# Altium PCB HGD_Sensor(v0.1)-20200807.PcbDoc (part 2 of 3)
Units mil, origin at the board's own origin, x right, y up, seen from the top; angles counter-clockwise.
Board outline 2299.21 x 2125.98 mil, 2 copper layers (TopLayer, BottomLayer); 55 components, 33 nets, 176 pads, 331 vias.
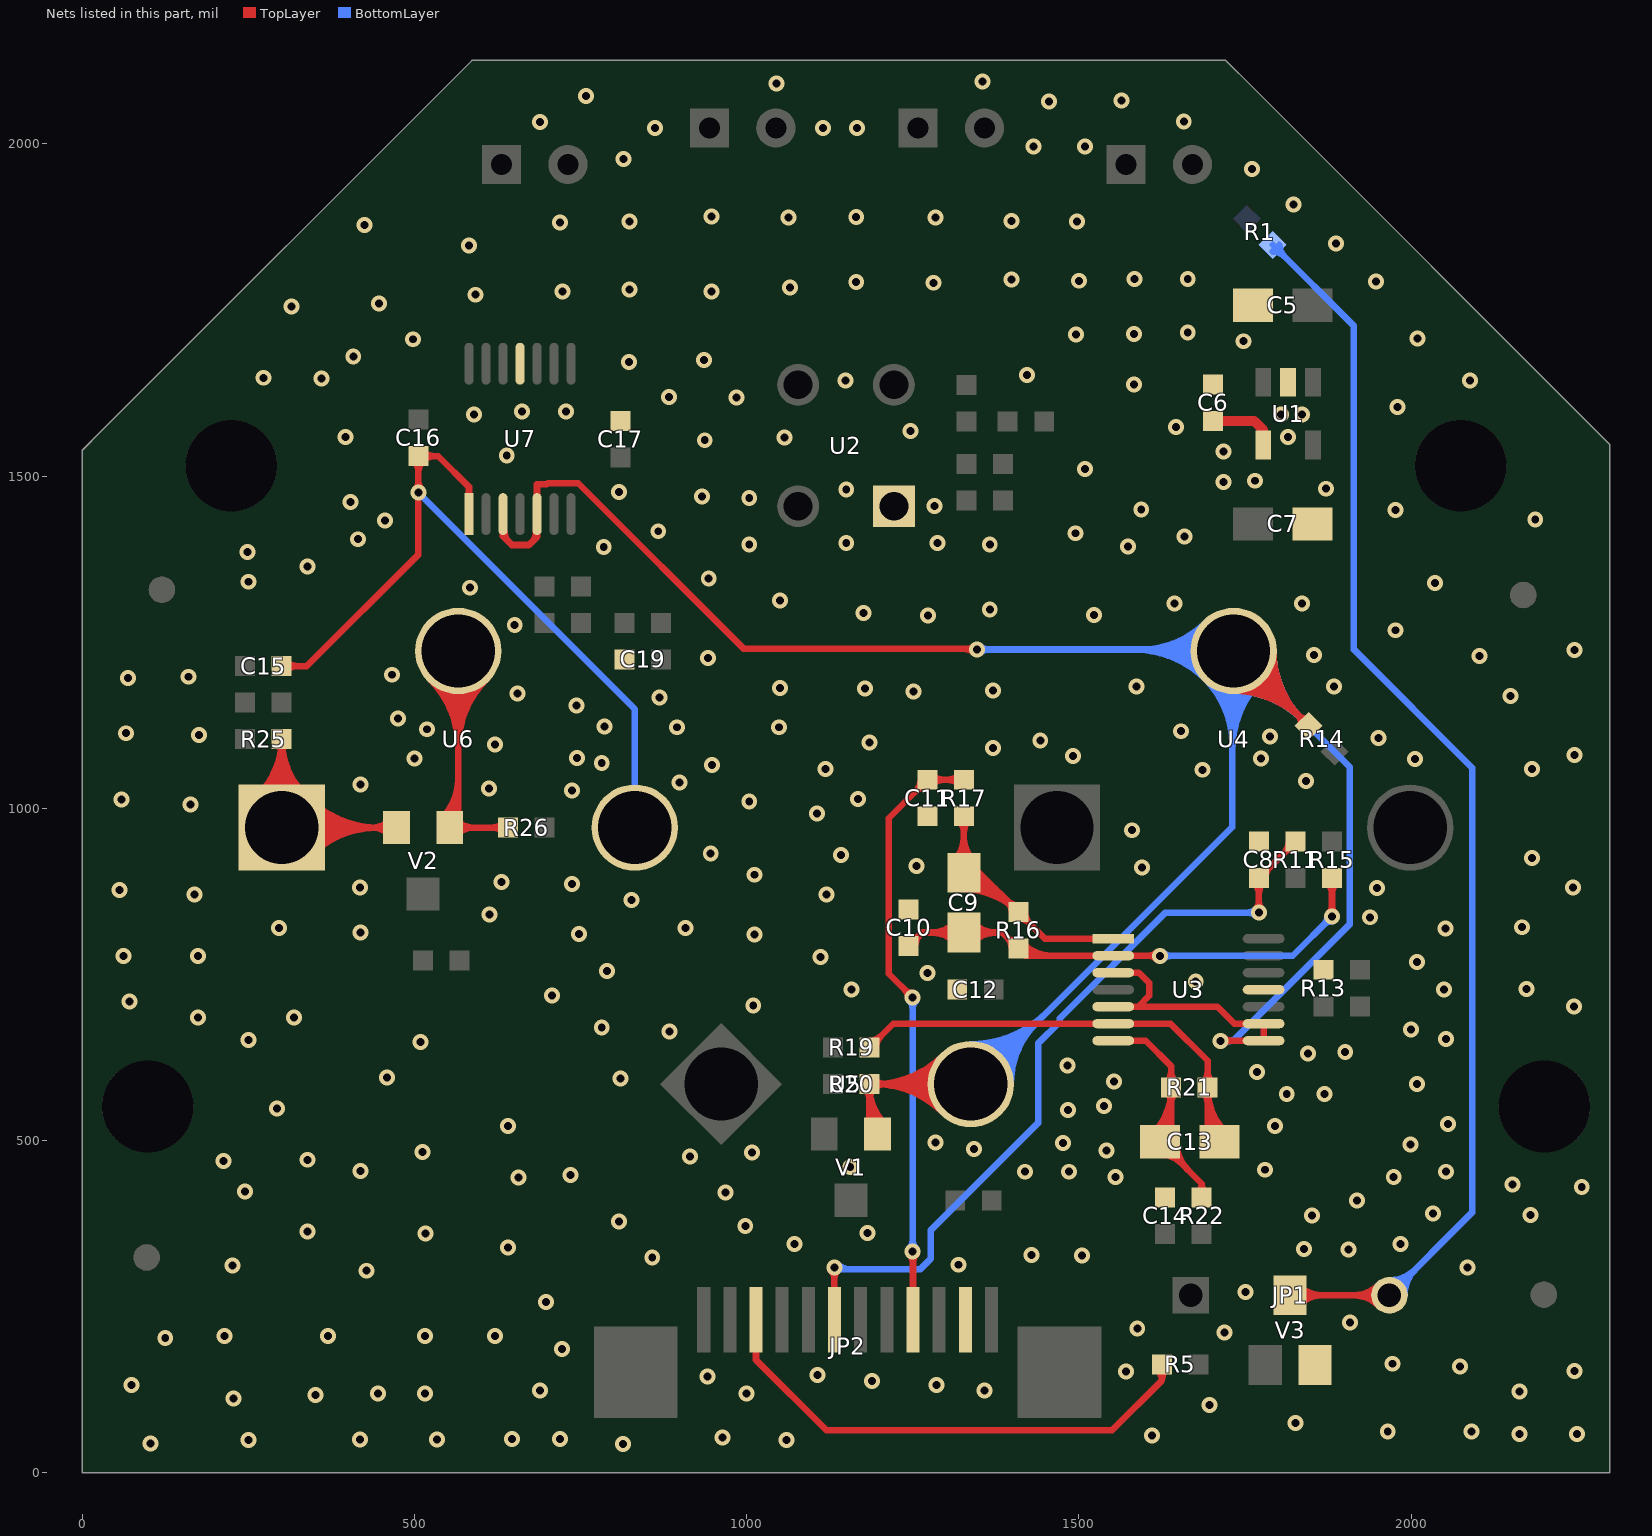
[diagram p2: the nets of this part, all layers, seen from the top]

## Via types
v1: diameter 24, hole 12, TopLayer to BottomLayer, tented both sides, 331 vias

## Nets (pads, with @x,y where several pads share a name; then routed paths per layer and width w, separated by ;. In a path a pad name is that pad's centre, name@x,y a point inside that pad or via, vN(x,y) a via of type N, cw(c..) or ccw(c..) an arc to the next point about the centre after c; other vN are vias at no path point) (continued)
ADC_LEL: C8.1 JP2.7 R11.1 | length 1983.7
  TopLayer w10: v1(1132,309) 1132,230.32 JP2.7@1132.32,230 ; v1(1771,843) C8.1@1771,895 R11.1@1826,950 ; v1@1127.05,304.05 cw(c1115.1,292.1) 1132,292.1 ; v1@1127.05,304.05 cw(c1115.1,292.1) 1132,292.1 ; v1@1127.05,304.05 cw(c1115.1,292.1) 1132,292.1 ; v1@1127.05,304.05 cw(c1115.1,292.1) 1132,292.1 ; JP2.7@1128.89,272.79 ccw(c1121.38,280.3) 1132,280.3 ; JP2.7@1128.89,272.79 ccw(c1121.38,280.3) 1132,280.3 ; JP2.7@1128.89,272.79 ccw(c1121.38,280.3) 1132,280.3 ; JP2.7@1128.89,272.79 ccw(c1121.38,280.3) 1132,280.3 ; 1132,281.82 ccw(c1144.77,281.82) JP2.7@1135.74,272.79 ; 1132,281.82 ccw(c1144.77,281.82) JP2.7@1135.74,272.79 ; 1132,281.82 ccw(c1144.77,281.82) JP2.7@1135.74,272.79 ; 1132,281.82 ccw(c1144.77,281.82) JP2.7@1135.74,272.79 ; 1132,292.1 cw(c1148.9,292.1) v1@1136.95,304.05 ; 1132,292.1 cw(c1148.9,292.1) v1@1136.95,304.05 ; 1132,292.1 cw(c1148.9,292.1) v1@1136.95,304.05 ; 1132,292.1 cw(c1148.9,292.1) v1@1136.95,304.05 ; C8.1@1763.93,887.93 cw(c1746.86,870.86) 1771,870.86 ; C8.1@1763.93,887.93 cw(c1746.86,870.86) 1771,870.86 ; C8.1@1763.93,887.93 cw(c1746.86,870.86) 1771,870.86 ; C8.1@1763.93,887.93 cw(c1746.86,870.86) 1771,870.86 ; v1@1766.05,847.95 ccw(c1754.1,859.9) 1771,859.9 ; v1@1766.05,847.95 ccw(c1754.1,859.9) 1771,859.9 ; v1@1766.05,847.95 ccw(c1754.1,859.9) 1771,859.9 ; v1@1766.05,847.95 ccw(c1754.1,859.9) 1771,859.9 ; 1771,859.9 ccw(c1787.9,859.9) v1@1775.95,847.95 ; 1771,859.9 ccw(c1787.9,859.9) v1@1775.95,847.95 ; 1771,859.9 ccw(c1787.9,859.9) v1@1775.95,847.95 ; 1771,859.9 ccw(c1787.9,859.9) v1@1775.95,847.95 ; 1771,870.86 cw(c1795.14,870.86) C8.1@1778.07,887.93 ; 1771,870.86 cw(c1795.14,870.86) C8.1@1778.07,887.93 ; 1771,870.86 cw(c1795.14,870.86) C8.1@1778.07,887.93 ; 1771,870.86 cw(c1795.14,870.86) C8.1@1778.07,887.93 ; C8.1@1771,905 ccw(c1771,929.14) 1788.07,912.07 ; C8.1@1771,905 ccw(c1771,929.14) 1788.07,912.07 ; C8.1@1771,905 ccw(c1771,929.14) 1788.07,912.07 ; C8.1@1771,905 ccw(c1771,929.14) 1788.07,912.07 ; C8.1@1781,895 cw(c1805.14,895) 1788.07,912.07 ; C8.1@1781,895 cw(c1805.14,895) 1788.07,912.07 ; C8.1@1781,895 cw(c1805.14,895) 1788.07,912.07 ; C8.1@1781,895 cw(c1805.14,895) 1788.07,912.07 ; 1808.93,932.93 ccw(c1791.86,950) 1816,950 cw(c1791.86,950) 1808.93,932.93 ; 1808.93,932.93 cw(c1826,915.86) 1826,940 ccw(c1826,915.86) 1808.93,932.93
  BottomLayer w10: v1(1132,309) 1135,306 1261.18,306 1277,321.82 1277,364.47 1438.73,526.2 1438.73,645.92 1471.26,678.45 1471.26,683.79 1630.47,843 v1(1771,843) ; 1754.1,843 ccw(c1754.1,859.9) v1@1766.05,847.95 ; 1754.1,843 cw(c1754.1,826.1) v1@1766.05,838.05 ; 1754.1,843 ccw(c1754.1,859.9) v1@1766.05,847.95 ; 1754.1,843 cw(c1754.1,826.1) v1@1766.05,838.05 ; 1754.1,843 ccw(c1754.1,859.9) v1@1766.05,847.95 ; 1754.1,843 cw(c1754.1,826.1) v1@1766.05,838.05 ; 1754.1,843 ccw(c1754.1,859.9) v1@1766.05,847.95 ; 1754.1,843 cw(c1754.1,826.1) v1@1766.05,838.05 ; v1@1136.95,313.95 ccw(c1156.14,333.14) 1156.14,306 cw(c1156.14,333.14) v1@1136.95,313.95
ADC_O2: C11.1 JP2.4 R17.1 | length 1784.5
  TopLayer w10: v1(1250,333) 1250.43,332.57 JP2.4@1250.43,230 ; v1(1250,715) 1214,751 1214,985 C11.1@1272,1043 R17.1@1327,1043 ; 1238.05,726.95 ccw(c1250,738.9) v1@1250,722 ; 1238.05,726.95 cw(c1226.1,715) v1@1243,715 ; 1238.05,726.95 ccw(c1250,738.9) v1@1250,722 ; 1238.05,726.95 cw(c1226.1,715) v1@1243,715 ; 1238.05,726.95 ccw(c1250,738.9) v1@1250,722 ; 1238.05,726.95 cw(c1226.1,715) v1@1243,715 ; 1238.05,726.95 ccw(c1250,738.9) v1@1250,722 ; 1238.05,726.95 cw(c1226.1,715) v1@1243,715 ; v1@1245.05,328.05 cw(c1232.07,315.07) 1250.43,315.07 ; v1@1245.05,328.05 cw(c1232.07,315.07) 1250.43,315.07 ; v1@1245.05,328.05 cw(c1232.07,315.07) 1250.43,315.07 ; v1@1245.05,328.05 cw(c1232.07,315.07) 1250.43,315.07 ; JP2.4@1247,272.79 ccw(c1238.73,281.06) 1250.43,281.06 ; JP2.4@1247,272.79 ccw(c1238.73,281.06) 1250.43,281.06 ; JP2.4@1247,272.79 ccw(c1238.73,281.06) 1250.43,281.06 ; JP2.4@1247,272.79 ccw(c1238.73,281.06) 1250.43,281.06 ; 1250.43,281.06 ccw(c1262.12,281.06) JP2.4@1253.85,272.79 ; 1250.43,281.06 ccw(c1262.12,281.06) JP2.4@1253.85,272.79 ; 1250.43,281.06 ccw(c1262.12,281.06) JP2.4@1253.85,272.79 ; 1250.43,281.06 ccw(c1262.12,281.06) JP2.4@1253.85,272.79 ; 1250.43,317.13 cw(c1265.87,317.13) v1@1254.95,328.05 ; 1250.43,317.13 cw(c1265.87,317.13) v1@1254.95,328.05 ; 1250.43,317.13 cw(c1265.87,317.13) v1@1254.95,328.05 ; 1250.43,317.13 cw(c1265.87,317.13) v1@1254.95,328.05 ; 1254.93,1025.93 ccw(c1237.86,1043) 1262,1043 cw(c1237.86,1043) 1254.93,1025.93 ; 1254.93,1025.93 cw(c1272,1008.86) 1272,1033 ccw(c1272,1008.86) 1254.93,1025.93 ; C11.1@1279.07,1035.93 cw(c1296.14,1018.86) 1296.14,1043 ; C11.1@1279.07,1035.93 cw(c1296.14,1018.86) 1296.14,1043 ; C11.1@1279.07,1035.93 cw(c1296.14,1018.86) 1296.14,1043 ; C11.1@1279.07,1035.93 cw(c1296.14,1018.86) 1296.14,1043 ; C11.1@1279.07,1050.07 ccw(c1296.14,1067.14) 1296.14,1043 ; C11.1@1279.07,1050.07 ccw(c1296.14,1067.14) 1296.14,1043 ; C11.1@1279.07,1050.07 ccw(c1296.14,1067.14) 1296.14,1043 ; C11.1@1279.07,1050.07 ccw(c1296.14,1067.14) 1296.14,1043 ; 1302.86,1043 ccw(c1302.86,1067.14) R17.1@1319.93,1050.07 ; 1302.86,1043 cw(c1302.86,1018.86) R17.1@1319.93,1035.93 ; 1302.86,1043 ccw(c1302.86,1067.14) R17.1@1319.93,1050.07 ; 1302.86,1043 cw(c1302.86,1018.86) R17.1@1319.93,1035.93 ; 1302.86,1043 ccw(c1302.86,1067.14) R17.1@1319.93,1050.07 ; 1302.86,1043 cw(c1302.86,1018.86) R17.1@1319.93,1035.93 ; 1302.86,1043 ccw(c1302.86,1067.14) R17.1@1319.93,1050.07 ; 1302.86,1043 cw(c1302.86,1018.86) R17.1@1319.93,1035.93
  BottomLayer w10: v1(1250,333) v1(1250,715) ; v1@1245.05,337.95 ccw(c1233.1,349.9) 1250,349.9 ; v1@1245.05,337.95 ccw(c1233.1,349.9) 1250,349.9 ; v1@1245.05,337.95 ccw(c1233.1,349.9) 1250,349.9 ; v1@1245.05,337.95 ccw(c1233.1,349.9) 1250,349.9 ; v1@1245.05,710.05 cw(c1233.1,698.1) 1250,698.1 ; v1@1245.05,710.05 cw(c1233.1,698.1) 1250,698.1 ; v1@1245.05,710.05 cw(c1233.1,698.1) 1250,698.1 ; v1@1245.05,710.05 cw(c1233.1,698.1) 1250,698.1 ; 1250,349.9 ccw(c1266.9,349.9) v1@1254.95,337.95 ; 1250,349.9 ccw(c1266.9,349.9) v1@1254.95,337.95 ; 1250,349.9 ccw(c1266.9,349.9) v1@1254.95,337.95 ; 1250,349.9 ccw(c1266.9,349.9) v1@1254.95,337.95 ; 1250,698.1 cw(c1266.9,698.1) v1@1254.95,710.05 ; 1250,698.1 cw(c1266.9,698.1) v1@1254.95,710.05 ; 1250,698.1 cw(c1266.9,698.1) v1@1254.95,710.05 ; 1250,698.1 cw(c1266.9,698.1) v1@1254.95,710.05
AGND: R14.1 R20.2 U3.3 U3.5 U3.8 U3.9 U4.2 U5.2 U7.3 U7.5 V1.1 | length 15126
  TopLayer w10: U7.3@633.41,1442.81 633.41,1409.59 646.68,1396.32 672.32,1396.32 684.59,1408.59 U7.5@684.59,1442.81 684.59,1487.59 699.4,1487.59 ; 701.11,1489.31 746.69,1489.31 996,1240 v1@1346,1240 ; V1.1@1197,510 1185,522 R20.2@1185,585 1337.43,585 U5.2@1337.52,584.91 ; U3.5@1551.81,701.41 1589.41,701.41 ; U3.3@1551.81,752.59 1590.41,752.59 1606,737 1606,718 1589.41,701.41 ; v1@1713.23,650.23 U3.8@1778.19,650.23 U3.9@1778.19,675.82 1734.18,675.82 1708.59,701.41 1589.41,701.41 ; U4.2@1733,1236.75 1733.25,1236.75 R14.1@1846,1124 ; U7.3@635.3,1418.17 ccw(c659.48,1417.72) 642.38,1400.62 ; U7.3@635.3,1418.17 ccw(c659.48,1417.72) 642.38,1400.62 ; U7.3@635.3,1418.17 ccw(c659.48,1417.72) 642.38,1400.62 ; U7.3@635.3,1418.17 ccw(c659.48,1417.72) 642.38,1400.62 ; 677.12,1401.12 ccw(c663.12,1415.12) U7.5@682.72,1417.94 ; 677.12,1401.12 ccw(c663.12,1415.12) U7.5@682.72,1417.94 ; 677.12,1401.12 ccw(c663.12,1415.12) U7.5@682.72,1417.94 ; 677.12,1401.12 ccw(c663.12,1415.12) U7.5@682.72,1417.94 ; R20.2@1177.93,577.93 cw(c1160.86,560.86) 1185,560.86 ; R20.2@1177.93,577.93 cw(c1160.86,560.86) 1185,560.86 ; R20.2@1177.93,577.93 cw(c1160.86,560.86) 1185,560.86 ; R20.2@1177.93,577.93 cw(c1160.86,560.86) 1185,560.86 ; 1185,560.86 cw(c1209.14,560.86) R20.2@1192.07,577.93 ; 1185,560.86 cw(c1209.14,560.86) R20.2@1192.07,577.93 ; 1185,560.86 cw(c1209.14,560.86) R20.2@1192.07,577.93 ; 1185,560.86 cw(c1209.14,560.86) R20.2@1192.07,577.93 ; R20.2@1192.07,577.93 cw(c1209.14,560.86) 1209.14,585 ; R20.2@1192.07,577.93 cw(c1209.14,560.86) 1209.14,585 ; R20.2@1192.07,577.93 cw(c1209.14,560.86) 1209.14,585 ; R20.2@1192.07,577.93 cw(c1209.14,560.86) 1209.14,585 ; R20.2@1192.07,592.07 ccw(c1209.14,609.14) 1209.14,585 ; R20.2@1192.07,592.07 ccw(c1209.14,609.14) 1209.14,585 ; R20.2@1192.07,592.07 ccw(c1209.14,609.14) 1209.14,585 ; R20.2@1192.07,592.07 ccw(c1209.14,609.14) 1209.14,585 ; v1@1717.95,645.05 cw(c1730.45,632.55) 1730.45,650.23 ; v1@1717.95,645.05 cw(c1730.45,632.55) 1730.45,650.23 ; v1@1717.95,645.05 cw(c1730.45,632.55) 1730.45,650.23 ; v1@1717.95,645.05 cw(c1730.45,632.55) 1730.45,650.23 ; v1@1717.95,654.95 ccw(c1729.35,666.35) 1729.35,650.23 ; v1@1717.95,654.95 ccw(c1729.35,666.35) 1729.35,650.23 ; v1@1717.95,654.95 ccw(c1729.35,666.35) 1729.35,650.23 ; v1@1717.95,654.95 ccw(c1729.35,666.35) 1729.35,650.23 ; U4.2@1733,1176.79 cw(c1733,1031.42) R14.1@1835.79,1134.21 ; U4.2@1733,1176.79 cw(c1733,1031.42) R14.1@1835.79,1134.21 ; U4.2@1733,1176.79 cw(c1733,1031.42) R14.1@1835.79,1134.21 ; U4.2@1733,1176.79 cw(c1733,1031.42) R14.1@1835.79,1134.21 ; U4.2@1733,1176.79 cw(c1733,1031.42) R14.1@1835.79,1134.21 ; U4.2@1733,1186.79 cw(c1733,1065.56) 1818.72,1151.28 ; U4.2@1733,1186.79 cw(c1733,1065.56) 1818.72,1151.28 ; U4.2@1733,1186.79 cw(c1733,1065.56) 1818.72,1151.28 ; U4.2@1733,1186.79 cw(c1733,1065.56) 1818.72,1151.28 ; U4.2@1733,1186.79 cw(c1733,1065.56) 1818.72,1151.28 ; U4.2@1733,1196.79 cw(c1733,1099.71) 1801.65,1168.35 ; U4.2@1733,1196.79 cw(c1733,1099.71) 1801.65,1168.35 ; U4.2@1733,1196.79 cw(c1733,1099.71) 1801.65,1168.35 ; U4.2@1733,1196.79 cw(c1733,1099.71) 1801.65,1168.35 ; U4.2@1733,1196.79 cw(c1733,1099.71) 1801.65,1168.35 ; U4.2@1733,1206.79 cw(c1733,1133.85) 1784.58,1185.42 ; U4.2@1733,1206.79 cw(c1733,1133.85) 1784.58,1185.42 ; U4.2@1733,1206.79 cw(c1733,1133.85) 1784.58,1185.42 ; U4.2@1733,1206.79 cw(c1733,1133.85) 1784.58,1185.42 ; U4.2@1733,1206.79 cw(c1733,1133.85) 1784.58,1185.42 ; U4.2@1762.96,1236.75 ccw(c1834.68,1236.75) 1783.97,1186.03 ; U4.2@1762.96,1236.75 ccw(c1834.68,1236.75) 1783.97,1186.03 ; U4.2@1762.96,1236.75 ccw(c1834.68,1236.75) 1783.97,1186.03 ; U4.2@1762.96,1236.75 ccw(c1834.68,1236.75) 1783.97,1186.03 ; U4.2@1762.96,1236.75 ccw(c1834.68,1236.75) 1783.97,1186.03 ; U4.2@1772.96,1236.75 ccw(c1868.83,1236.75) 1801.04,1168.96 ; U4.2@1772.96,1236.75 ccw(c1868.83,1236.75) 1801.04,1168.96 ; U4.2@1772.96,1236.75 ccw(c1868.83,1236.75) 1801.04,1168.96 ; U4.2@1772.96,1236.75 ccw(c1868.83,1236.75) 1801.04,1168.96 ; U4.2@1772.96,1236.75 ccw(c1868.83,1236.75) 1801.04,1168.96 ; U4.2@1782.96,1236.75 ccw(c1902.97,1236.75) 1818.11,1151.89 ; U4.2@1782.96,1236.75 ccw(c1902.97,1236.75) 1818.11,1151.89 ; U4.2@1782.96,1236.75 ccw(c1902.97,1236.75) 1818.11,1151.89 ; U4.2@1782.96,1236.75 ccw(c1902.97,1236.75) 1818.11,1151.89 ; U4.2@1782.96,1236.75 ccw(c1902.97,1236.75) 1818.11,1151.89 ; U4.2@1792.96,1236.75 ccw(c1937.11,1236.75) 1835.18,1134.82 ; U4.2@1792.96,1236.75 ccw(c1937.11,1236.75) 1835.18,1134.82 ; U4.2@1792.96,1236.75 ccw(c1937.11,1236.75) 1835.18,1134.82 ; U4.2@1792.96,1236.75 ccw(c1937.11,1236.75) 1835.18,1134.82 ; U4.2@1792.96,1236.75 ccw(c1937.11,1236.75) 1835.18,1134.82 ; 1828.93,1141.07 cw(c1811.86,1124) R14.1@1836,1124 ; 1828.93,1141.07 ccw(c1846,1158.14) R14.1@1846,1134 ; 1828.93,1141.07 ccw(c1846,1158.14) R14.1@1846,1134 ; 1828.93,1141.07 cw(c1811.86,1124) R14.1@1836,1124 ; 1828.93,1141.07 ccw(c1846,1158.14) R14.1@1846,1134 ; 1828.93,1141.07 cw(c1811.86,1124) R14.1@1836,1124 ; 1828.93,1141.07 ccw(c1846,1158.14) R14.1@1846,1134 ; 1828.93,1141.07 cw(c1811.86,1124) R14.1@1836,1124 ; 1828.93,1141.07 ccw(c1846,1158.14) R14.1@1846,1134 ; 1828.93,1141.07 cw(c1811.86,1124) R14.1@1836,1124 ; V1.1@1185,531.9 ccw(c1213.9,531.9) 1193.46,511.46 cw(c1213.9,531.9) V1.1@1185,531.9 ; 1185,556.04 ccw(c1238.04,556.04) 1200.54,518.54 cw(c1238.04,556.04) 1185,556.04 ; R20.2@1185,580.18 ccw(c1262.18,580.18) 1207.61,525.61 cw(c1262.18,580.18) R20.2@1185,580.18 ; R20.2@1192.55,585 cw(c1192.55,439.94) 1295.12,542.51 ccw(c1192.55,439.94) R20.2@1192.55,585 ; R20.2@1192.97,585 ccw(c1192.97,729.46) 1295.12,627.31 cw(c1192.97,729.46) R20.2@1192.97,585 ; 1216.69,585 cw(c1216.69,464.08) 1302.19,549.58 ccw(c1216.69,464.08) 1216.69,585 ; 1217.11,585 ccw(c1217.11,705.32) 1302.19,620.24 cw(c1217.11,705.32) 1217.11,585 ; 1240.83,585 cw(c1240.83,488.23) 1309.26,556.66 ccw(c1240.83,488.23) 1240.83,585 ; 1241.26,585 ccw(c1241.26,681.17) 1309.26,613.17 cw(c1241.26,681.17) 1241.26,585 ; 1264.98,585 cw(c1264.98,512.37) 1316.33,563.73 ccw(c1264.98,512.37) 1264.98,585 ; 1265.4,585 ccw(c1265.4,657.03) 1316.33,606.1 cw(c1265.4,657.03) 1265.4,585 ; 1327.69,1240 cw(c1327.69,1219.69) 1342.05,1234.05 ccw(c1327.69,1219.69) 1327.69,1240 ; 1332.51,1240 ccw(c1332.51,1253.49) 1342.05,1243.95 cw(c1332.51,1253.49) 1332.51,1240
  BottomLayer w10: U5.2@1337.52,584.91 1344.1,584.91 1730.75,971.56 U4.2@1730.75,1239 ; v1(1347,1239) U4.2@1730.75,1239 ; v1(1713,650) 1732.18,650 1908,825.82 1908,1061.75 U4.2@1733,1236.75 U4.2@1730.75,1239 ; v1@1351.95,1234.05 cw(c1363.9,1222.1) 1363.9,1239 ; v1@1351.95,1234.05 cw(c1363.9,1222.1) 1363.9,1239 ; v1@1351.95,1234.05 cw(c1363.9,1222.1) 1363.9,1239 ; v1@1351.95,1234.05 cw(c1363.9,1222.1) 1363.9,1239 ; v1@1351.95,1243.95 ccw(c1363.9,1255.9) 1363.9,1239 ; v1@1351.95,1243.95 ccw(c1363.9,1255.9) 1363.9,1239 ; v1@1351.95,1243.95 ccw(c1363.9,1255.9) 1363.9,1239 ; v1@1351.95,1243.95 ccw(c1363.9,1255.9) 1363.9,1239 ; U4.2@1690.6,1194.35 cw(c1593.68,1097.43) 1730.75,1097.43 ccw(c1593.68,1097.43) U4.2@1690.6,1194.35 ; U4.2@1690.6,1194.35 ccw(c1582.81,1086.55) 1582.81,1239 cw(c1582.81,1086.55) U4.2@1690.6,1194.35 ; U4.2@1697.67,1201.42 cw(c1617.82,1121.57) 1730.75,1121.57 ccw(c1617.82,1121.57) U4.2@1697.67,1201.42 ; U4.2@1697.67,1201.42 ccw(c1606.95,1110.7) 1606.95,1239 cw(c1606.95,1110.7) U4.2@1697.67,1201.42 ; U4.2@1704.74,1208.49 cw(c1641.96,1145.71) 1730.75,1145.71 ccw(c1641.96,1145.71) U4.2@1704.74,1208.49 ; U4.2@1704.74,1208.49 ccw(c1631.09,1134.84) 1631.09,1239 cw(c1631.09,1134.84) U4.2@1704.74,1208.49 ; U4.2@1711.81,1215.56 cw(c1666.11,1169.85) 1730.75,1169.85 ccw(c1666.11,1169.85) U4.2@1711.81,1215.56 ; U4.2@1711.81,1215.56 ccw(c1655.23,1158.98) 1655.23,1239 cw(c1655.23,1158.98) U4.2@1711.81,1215.56 ; v1@1717.95,645.05 cw(c1729.9,633.1) 1729.9,650 ; v1@1717.95,645.05 cw(c1729.9,633.1) 1729.9,650 ; v1@1717.95,645.05 cw(c1729.9,633.1) 1729.9,650 ; v1@1717.95,645.05 cw(c1729.9,633.1) 1729.9,650 ; v1@1717.95,654.95 ccw(c1729.9,666.9) 1729.9,650 ; v1@1717.95,654.95 ccw(c1729.9,666.9) 1729.9,650 ; v1@1717.95,654.95 ccw(c1729.9,666.9) 1729.9,650 ; v1@1717.95,654.95 ccw(c1729.9,666.9) 1729.9,650 ; 1784.15,1185.6 ccw(c1733,1134.46) 1733,1206.79 cw(c1733,1134.46) 1784.15,1185.6 ; 1784.15,1185.6 cw(c1835.29,1236.75) 1762.96,1236.75 ccw(c1835.29,1236.75) 1784.15,1185.6 ; 1801.22,1168.53 ccw(c1733,1100.31) 1733,1196.79 cw(c1733,1100.31) 1801.22,1168.53 ; 1801.22,1168.53 cw(c1869.43,1236.75) 1772.96,1236.75 ccw(c1869.43,1236.75) 1801.22,1168.53 ; 1818.29,1151.46 ccw(c1733,1066.17) 1733,1186.79 cw(c1733,1066.17) 1818.29,1151.46 ; 1818.29,1151.46 cw(c1903.58,1236.75) 1782.96,1236.75 ccw(c1903.58,1236.75) 1818.29,1151.46 ; 1835.36,1134.39 ccw(c1733,1032.03) 1733,1176.79 cw(c1733,1032.03) 1835.36,1134.39 ; 1835.36,1134.39 cw(c1937.72,1236.75) 1792.96,1236.75 ccw(c1937.72,1236.75) 1835.36,1134.39 ; U5.2@1337.52,614.87 ccw(c1337.52,703.08) 1399.89,640.71 cw(c1337.52,703.08) U5.2@1337.52,614.87 ; U5.2@1337.52,624.87 ccw(c1337.52,737.23) 1416.96,657.78 cw(c1337.52,737.23) U5.2@1337.52,624.87 ; U5.2@1337.52,634.87 ccw(c1337.52,771.37) 1434.03,674.85 cw(c1337.52,771.37) U5.2@1337.52,634.87 ; U5.2@1337.52,644.87 ccw(c1337.52,805.51) 1451.11,691.92 cw(c1337.52,805.51) U5.2@1337.52,644.87 ; U5.2@1377.48,584.91 cw(c1458.07,584.91) 1401.08,641.9 ccw(c1458.07,584.91) U5.2@1377.48,584.91 ; U5.2@1387.48,584.91 cw(c1492.22,584.91) 1418.16,658.97 ccw(c1492.22,584.91) U5.2@1387.48,584.91 ; U5.2@1397.48,584.91 cw(c1526.36,584.91) 1435.23,676.04 ccw(c1526.36,584.91) U5.2@1397.48,584.91 ; 1593.68,1239 ccw(c1593.68,1376.07) 1690.6,1279.15 cw(c1593.68,1376.07) 1593.68,1239 ; 1617.82,1239 ccw(c1617.82,1351.93) 1697.67,1272.08 cw(c1617.82,1351.93) 1617.82,1239 ; 1641.96,1239 ccw(c1641.96,1327.78) 1704.74,1265 cw(c1641.96,1327.78) 1641.96,1239 ; 1666.11,1239 ccw(c1666.11,1303.64) 1711.81,1257.93 cw(c1666.11,1303.64) 1666.11,1239 ; 1730.75,1086.55 cw(c1883.19,1086.55) 1775.4,1194.35 ccw(c1883.19,1086.55) 1730.75,1086.55 ; 1730.75,1110.7 cw(c1859.05,1110.7) 1768.33,1201.42 ccw(c1859.05,1110.7) 1730.75,1110.7 ; 1730.75,1134.84 cw(c1834.91,1134.84) 1761.26,1208.49 ccw(c1834.91,1134.84) 1730.75,1134.84 ; 1730.75,1158.98 cw(c1810.77,1158.98) 1754.19,1215.56 ccw(c1810.77,1158.98) 1730.75,1158.98
BEEP: JP2.10 R5.1 | length 1016.7
  TopLayer w10: JP2.10@1013.2,230 JP2.10@1013.2,253 ; JP2.10@1014.2,230 1014.2,169.8 1120,64 1550,64 1625,139 ; R5.1@1625,163 1625,139 ; JP2.10@1010.78,187.21 cw(c1002.51,178.94) 1014.2,178.94 ; JP2.10@1010.78,187.21 cw(c1002.51,178.94) 1014.2,178.94 ; JP2.10@1010.78,187.21 cw(c1002.51,178.94) 1014.2,178.94 ; JP2.10@1010.78,187.21 cw(c1002.51,178.94) 1014.2,178.94 ; 1014.2,178.94 cw(c1025.9,178.94) JP2.10@1017.63,187.21 ; 1014.2,178.94 cw(c1025.9,178.94) JP2.10@1017.63,187.21 ; 1014.2,178.94 cw(c1025.9,178.94) JP2.10@1017.63,187.21 ; 1014.2,178.94 cw(c1025.9,178.94) JP2.10@1017.63,187.21 ; R5.1@1617.96,155.9 cw(c1601.2,139) 1625,139 ; R5.1@1617.96,155.9 cw(c1601.2,139) 1625,139 ; R5.1@1617.96,155.9 cw(c1601.2,139) 1625,139 ; R5.1@1617.96,155.9 cw(c1601.2,139) 1625,139 ; 1625,139 cw(c1648.8,139) R5.1@1632.04,155.9 ; 1625,139 cw(c1648.8,139) R5.1@1632.04,155.9 ; 1625,139 cw(c1648.8,139) R5.1@1632.04,155.9 ; 1625,139 cw(c1648.8,139) R5.1@1632.04,155.9
DGND: C5.2 C6.2 C7.2 C8.2 C10.2 C11.2 C12.1 C14.2 C17.1 C19.2 JP2.2 R13.2 U1.2 U2.1 U3.11 U7.11 V3.E
  other v1: 814,43 103,44 250,49 1060,49 418,50 534,50 647,51 719,51 964,53 1610,56 2163,58 2250,58 1965,62 2091,62 1826,75 1697,102 228,112 351,117 445,119 516,119 1000,119 2163,122 689,124 1358,124 74,132 1286,132 1189,138 941,145 1107,147 1571,152 2246,153 2074,160 1972,164 722,186 125,203 214,206 370,206 516,206 621,206 1719,211 1588,217 1908,226 698,257 1751,272 428,304 2085,309 226,312 1319,313 858,324 1505,327 1429,328 1906,336 1839,337 641,339 1072,344 1984,344 517,360 1182,361 339,363 998,371 808,378 1851,387 2180,388 2033,390 1919,410 968,422 245,423 2257,430 2153,434 657,444 1555,445 1974,445 735,448 1419,453 1485,453 2053,453 419,454 1780,456 1156,460 213,469 339,471 915,476 1008,482 512,483 1542,485 1342,487 1999,494 1476,496 1284,497 641,522 1795,522 2056,525 1484,546 293,548 1538,552 1813,570 1870,570 2009,585 1553,589 810,593 459,595 1768,603 1483,613 1845,631 1901,633 509,648 250,651 2053,653 884,664 2000,667 782,670 174,685 319,685 2245,702 1010,703 71,709 707,718 1158,727 2050,727 2174,728 1676,739 1272,752 790,755 2009,769 1111,776 62,778 174,778 1012,810 748,811 419,813 2052,819 296,820 908,820 2167,821 1938,836 613,840 827,862 169,870 1120,870 56,877 1949,880 418,881 2244,881 737,886 631,889 1012,900 1595,911 1256,913 2182,925 1142,930 946,932 1580,967 1106,992 163,1006 1004,1010 59,1013 1168,1014 737,1027 612,1030 419,1036 899,1039 1842,1041 1686,1058 1119,1059 2182,1059 948,1065 782,1068 2006,1074 500,1075 1774,1075 745,1076 1491,1079 2246,1080 1371,1091 621,1096 1185,1099 1442,1102 1951,1106 1788,1108 176,1110 66,1113 1654,1116 519,1119 895,1122 1049,1122 786,1123 475,1135 744,1155 869,1167 2150,1169 655,1173 1251,1176 1371,1177 1178,1180 1050,1181 1587,1183 1884,1183 69,1196 160,1198 466,1201 942,1226 2103,1229 1854,1231 2246,1238 1977,1268 651,1276 1273,1290 1523,1291 1176,1294 1366,1299 1644,1308 1836,1308 1050,1313 584,1332 2036,1339 250,1341 943,1346 339,1364 249,1386 785,1393 1574,1394 1004,1397 1366,1397 1150,1399 1287,1399 415,1405 1659,1409 1495,1414 867,1417 456,1433 2187,1435 1977,1449 1594,1450 1283,1455 404,1461 1004,1467 933,1469 808,1476 1150,1480 1872,1481 1718,1491 1765,1493 1509,1511 639,1531 1718,1537 937,1554 1057,1558 396,1559 1815,1559 1247,1568 1646,1574 590,1593 1804,1593 1836,1593 662,1597 728,1597 1980,1604 985,1618 883,1619 1583,1638 1149,1644 2089,1644 360,1647 273,1648 1422,1652 823,1672 936,1675 408,1680 1748,1703 498,1706 2010,1707 1496,1713 1583,1714 1664,1716 315,1755 447,1760 592,1773 723,1778 947,1778 824,1781 1065,1784 1281,1791 1165,1792 1947,1793 1500,1794 1399,1796 1584,1797 1664,1797 582,1847 1887,1850 425,1878 719,1882 824,1883 1497,1883 1399,1884 1063,1889 1284,1889 1165,1890 947,1891 1823,1909 1761,1962 815,1977 1432,1996 1509,1996 862,2024 1115,2024 1166,2024 689,2033 1658,2034 1455,2064 1564,2065 758,2072 1045,2091 1355,2094
H2S_C: C15.1 C16.2 U6.3 U7.1 | length 1760.1
  TopLayer w10: C15.1@300,1214 338,1214 506,1382 v1(506,1475) C16.2@506,1530 536,1530 582.23,1483.77 U7.1@582.23,1442.81 ; C15.1@307.07,1206.93 cw(c324.14,1189.86) 324.14,1214 ; C15.1@307.07,1206.93 cw(c324.14,1189.86) 324.14,1214 ; C15.1@307.07,1206.93 cw(c324.14,1189.86) 324.14,1214 ; C15.1@307.07,1206.93 cw(c324.14,1189.86) 324.14,1214 ; C15.1@307.07,1221.07 ccw(c324.14,1238.14) 324.14,1214 ; C15.1@307.07,1221.07 ccw(c324.14,1238.14) 324.14,1214 ; C15.1@307.07,1221.07 ccw(c324.14,1238.14) 324.14,1214 ; C15.1@307.07,1221.07 ccw(c324.14,1238.14) 324.14,1214 ; C16.2@498.93,1522.93 cw(c481.86,1505.86) 506,1505.86 ; C16.2@498.93,1522.93 cw(c481.86,1505.86) 506,1505.86 ; C16.2@498.93,1522.93 cw(c481.86,1505.86) 506,1505.86 ; C16.2@498.93,1522.93 cw(c481.86,1505.86) 506,1505.86 ; v1@501.05,1479.95 ccw(c489.1,1491.9) 506,1491.9 ; v1@501.05,1479.95 ccw(c489.1,1491.9) 506,1491.9 ; v1@501.05,1479.95 ccw(c489.1,1491.9) 506,1491.9 ; v1@501.05,1479.95 ccw(c489.1,1491.9) 506,1491.9 ; 506,1491.9 ccw(c522.9,1491.9) v1@510.95,1479.95 ; 506,1491.9 ccw(c522.9,1491.9) v1@510.95,1479.95 ; 506,1491.9 ccw(c522.9,1491.9) v1@510.95,1479.95 ; 506,1491.9 ccw(c522.9,1491.9) v1@510.95,1479.95 ; 506,1505.86 cw(c530.14,1505.86) C16.2@513.07,1522.93 ; 506,1505.86 cw(c530.14,1505.86) C16.2@513.07,1522.93 ; 506,1505.86 cw(c530.14,1505.86) C16.2@513.07,1522.93 ; 506,1505.86 cw(c530.14,1505.86) C16.2@513.07,1522.93 ; C16.2@513.07,1522.93 cw(c530.14,1505.86) 530.14,1530 ; C16.2@513.07,1522.93 cw(c530.14,1505.86) 530.14,1530 ; C16.2@513.07,1522.93 cw(c530.14,1505.86) 530.14,1530 ; C16.2@513.07,1522.93 cw(c530.14,1505.86) 530.14,1530 ; C16.2@513.07,1537.07 ccw(c530.14,1554.14) 530.14,1530 ; C16.2@513.07,1537.07 ccw(c530.14,1554.14) 530.14,1530 ; C16.2@513.07,1537.07 ccw(c530.14,1554.14) 530.14,1530 ; C16.2@513.07,1537.07 ccw(c530.14,1554.14) 530.14,1530
  BottomLayer w10: v1(506,1475) 831.75,1149.25 U6.3@831.75,971
H2S_R: R25.2 U6.1 V2.2 | length 3125.9
  TopLayer w10: R25.2@300,1104 R25.2@300.25,1103.75 ; V2.2@473,971 U6.1@300.25,971 R25.2@300.25,1103.75 ; R25.2@292.93,1096.93 cw(c275.25,1079.25) 300.25,1079.25 ; R25.2@292.93,1096.93 cw(c275.25,1079.25) 300.25,1079.25 ; R25.2@292.93,1096.93 cw(c275.25,1079.25) 300.25,1079.25 ; R25.2@292.93,1096.93 cw(c275.25,1079.25) 300.25,1079.25 ; 300.25,1037.33 ccw(c358.69,1037.33) 320.06,993.48 cw(c358.69,1037.33) 300.25,1037.33 ; 300.25,1037.33 cw(c241.81,1037.33) 280.45,993.48 ccw(c241.81,1037.33) 300.25,1037.33 ; 300.25,1059.47 ccw(c378.2,1059.47) 326.67,1000.98 cw(c378.2,1059.47) 300.25,1059.47 ; 300.25,1059.47 cw(c222.31,1059.47) 273.83,1000.98 ccw(c222.31,1059.47) 300.25,1059.47 ; 300.25,1080.47 cw(c323.53,1080.47) R25.2@307.07,1096.93 ; 300.25,1080.47 cw(c323.53,1080.47) R25.2@307.07,1096.93 ; 300.25,1080.47 cw(c323.53,1080.47) R25.2@307.07,1096.93 ; 300.25,1080.47 cw(c323.53,1080.47) R25.2@307.07,1096.93 ; 300.25,1081.6 ccw(c397.7,1081.6) 333.28,1008.49 cw(c397.7,1081.6) 300.25,1081.6 ; 300.25,1081.6 cw(c202.8,1081.6) 267.22,1008.49 ccw(c202.8,1081.6) 300.25,1081.6 ; R25.2@300.25,1103.74 ccw(c417.21,1103.74) 339.89,1015.99 cw(c417.21,1103.74) R25.2@300.25,1103.74 ; R25.2@300.25,1103.74 cw(c183.3,1103.74) 260.61,1015.99 ccw(c183.3,1103.74) R25.2@300.25,1103.74 ; 372.58,971 ccw(c372.58,898.67) 321.44,949.81 cw(c372.58,898.67) 372.58,971 ; 372.58,971 cw(c372.58,1043.33) 321.44,992.19 ccw(c372.58,1043.33) 372.58,971 ; 396.73,971 ccw(c396.73,874.53) 328.51,942.74 cw(c396.73,874.53) 396.73,971 ; 396.73,971 cw(c396.73,1067.47) 328.51,999.26 ccw(c396.73,1067.47) 396.73,971 ; 420.87,971 ccw(c420.87,850.38) 335.58,935.67 cw(c420.87,850.38) 420.87,971 ; 420.87,971 cw(c420.87,1091.62) 335.58,1006.33 ccw(c420.87,1091.62) 420.87,971 ; 436.79,971 ccw(c436.79,1007.21) 462.39,981.61 cw(c436.79,1007.21) 436.79,971 ; 436.79,971 cw(c436.79,934.79) 462.39,960.39 ccw(c436.79,934.79) 436.79,971 ; 445.01,971 ccw(c445.01,826.24) 342.65,928.6 cw(c445.01,826.24) 445.01,971 ; 445.01,971 cw(c445.01,1115.76) 342.65,1013.4 ccw(c445.01,1115.76) 445.01,971
H2S_W: R26.1 U6.2 V2.1 | length 2254.6
  TopLayer w10: U6.2@566,1236.75 566,984 V2.1@553,971 R26.1@641,971 ; 566,1091.99 ccw(c421.24,1091.99) 523.6,1194.35 cw(c421.24,1091.99) 566,1091.99 ; 566,1091.99 cw(c710.76,1091.99) 608.4,1194.35 ccw(c710.76,1091.99) 566,1091.99 ; 566,1116.13 ccw(c445.38,1116.13) 530.67,1201.42 cw(c445.38,1116.13) 566,1116.13 ; 566,1116.13 cw(c686.62,1116.13) 601.33,1201.42 ccw(c686.62,1116.13) 566,1116.13 ; 566,1140.27 ccw(c469.53,1140.27) 537.74,1208.49 cw(c469.53,1140.27) 566,1140.27 ; 566,1140.27 cw(c662.47,1140.27) 594.26,1208.49 ccw(c662.47,1140.27) 566,1140.27 ; 566,1164.42 ccw(c493.67,1164.42) 544.81,1215.56 cw(c493.67,1164.42) 566,1164.42 ; 566,1164.42 cw(c638.33,1164.42) 587.19,1215.56 ccw(c638.33,1164.42) 566,1164.42 ; 589.21,971 ccw(c589.21,934.79) 563.61,960.39 cw(c589.21,934.79) 589.21,971 ; 589.21,971 cw(c589.21,1007.21) 563.61,981.61 ccw(c589.21,1007.21) 589.21,971 ; 616.86,971 ccw(c616.86,995.14) R26.1@633.93,978.07 ; 616.86,971 cw(c616.86,946.86) R26.1@633.93,963.93 ; 616.86,971 ccw(c616.86,995.14) R26.1@633.93,978.07 ; 616.86,971 cw(c616.86,946.86) R26.1@633.93,963.93 ; 616.86,971 ccw(c616.86,995.14) R26.1@633.93,978.07 ; 616.86,971 cw(c616.86,946.86) R26.1@633.93,963.93 ; 616.86,971 ccw(c616.86,995.14) R26.1@633.93,978.07 ; 616.86,971 cw(c616.86,946.86) R26.1@633.93,963.93 ; V2.1@542.39,986.61 ccw(c485.4,1043.6) 566,1043.6 cw(c485.4,1043.6) V2.1@542.39,986.61 ; V2.1@549.46,979.54 ccw(c509.54,1019.46) 566,1019.46 cw(c509.54,1019.46) V2.1@549.46,979.54 ; V2.1@556.54,972.46 ccw(c533.69,995.31) 566,995.31 cw(c533.69,995.31) V2.1@556.54,972.46
LED: JP1.2 R1.2 V3.C | length 3407.6
  TopLayer w10: V3.C@1818,267 JP1.2@1967.61,267 ; V3.C@1832.14,252.86 cw(c1866.28,218.72) 1866.28,267 ; V3.C@1832.14,252.86 cw(c1866.28,218.72) 1866.28,267 ; V3.C@1832.14,252.86 cw(c1866.28,218.72) 1866.28,267 ; V3.C@1832.14,252.86 cw(c1866.28,218.72) 1866.28,267 ; V3.C@1832.14,252.86 cw(c1866.28,218.72) 1866.28,267 ; V3.C@1832.14,281.14 ccw(c1866.28,315.28) 1866.28,267 ; V3.C@1832.14,281.14 ccw(c1866.28,315.28) 1866.28,267 ; V3.C@1832.14,281.14 ccw(c1866.28,315.28) 1866.28,267 ; V3.C@1832.14,281.14 ccw(c1866.28,315.28) 1866.28,267 ; V3.C@1832.14,281.14 ccw(c1866.28,315.28) 1866.28,267 ; 1913.14,267 cw(c1913.14,212.54) JP1.2@1951.65,251.05 ; 1913.14,267 ccw(c1913.14,321.46) JP1.2@1951.65,282.95 ; 1913.14,267 ccw(c1913.14,321.46) JP1.2@1951.65,282.95 ; 1913.14,267 cw(c1913.14,212.54) JP1.2@1951.65,251.05 ; 1913.14,267 ccw(c1913.14,321.46) JP1.2@1951.65,282.95 ; 1913.14,267 cw(c1913.14,212.54) JP1.2@1951.65,251.05 ; 1913.14,267 ccw(c1913.14,321.46) JP1.2@1951.65,282.95 ; 1913.14,267 cw(c1913.14,212.54) JP1.2@1951.65,251.05 ; 1913.14,267 ccw(c1913.14,321.46) JP1.2@1951.65,282.95 ; 1913.14,267 cw(c1913.14,212.54) JP1.2@1951.65,251.05 ; 1937.29,267 cw(c1937.29,236.68) JP1.2@1958.73,258.12 ; 1937.29,267 ccw(c1937.29,297.32) JP1.2@1958.73,275.88 ; 1937.29,267 ccw(c1937.29,297.32) JP1.2@1958.73,275.88 ; 1937.29,267 cw(c1937.29,236.68) JP1.2@1958.73,258.12 ; 1937.29,267 ccw(c1937.29,297.32) JP1.2@1958.73,275.88 ; 1937.29,267 cw(c1937.29,236.68) JP1.2@1958.73,258.12 ; 1937.29,267 ccw(c1937.29,297.32) JP1.2@1958.73,275.88 ; 1937.29,267 cw(c1937.29,236.68) JP1.2@1958.73,258.12 ; 1937.29,267 ccw(c1937.29,297.32) JP1.2@1958.73,275.88 ; 1937.29,267 cw(c1937.29,236.68) JP1.2@1958.73,258.12
  BottomLayer w10: R1.2@1791.89,1848.11 1914,1726 1914,1239 2092,1061 2092,391.39 JP1.2@1967.61,267 ; R1.2@1791.89,1838.11 cw(c1791.89,1813.97) 1808.96,1831.04 ; R1.2@1791.89,1838.11 cw(c1791.89,1813.97) 1808.96,1831.04 ; R1.2@1791.89,1838.11 cw(c1791.89,1813.97) 1808.96,1831.04 ; R1.2@1791.89,1838.11 cw(c1791.89,1813.97) 1808.96,1831.04 ; R1.2@1791.89,1838.11 cw(c1791.89,1813.97) 1808.96,1831.04 ; R1.2@1801.89,1848.11 ccw(c1826.03,1848.11) 1808.96,1831.04 ; R1.2@1801.89,1848.11 ccw(c1826.03,1848.11) 1808.96,1831.04 ; R1.2@1801.89,1848.11 ccw(c1826.03,1848.11) 1808.96,1831.04 ; R1.2@1801.89,1848.11 ccw(c1826.03,1848.11) 1808.96,1831.04 ; R1.2@1801.89,1848.11 ccw(c1826.03,1848.11) 1808.96,1831.04 ; 1989.05,288.44 ccw(c2010.49,267) 1980.17,267 cw(c2010.49,267) 1989.05,288.44 ; 1989.05,288.44 cw(c1967.61,309.88) 1967.61,279.56 ccw(c1967.61,309.88) 1989.05,288.44 ; 2006.12,305.51 ccw(c2044.63,267) 1990.17,267 cw(c2044.63,267) 2006.12,305.51 ; 2006.12,305.51 cw(c1967.61,344.02) 1967.61,289.56 ccw(c1967.61,344.02) 2006.12,305.51
NetC6_1: C6.1 U1.4 | length 103.9
  TopLayer w15: C6.1@1702,1583 1764,1583 1777.6,1569.4 U1.4@1777.6,1546.76
NetC9_1: C9.1 C10.1 R15.2 R16.2 U3.2 | length 2116.7
  TopLayer w10: C10.1@1244,793 1264,813 C9.1@1327,813 1385,813 R16.2@1409,789 ; 1586.82,778.18 U3.2@1551.81,778.18 ; v1(1622,778) 1621.82,778.18 U3.2@1551.81,778.18 ; v1(1881,837) R15.2@1881,895 ; 1261.07,810.07 ccw(c1278.14,793) 1254,793 cw(c1278.14,793) 1261.07,810.07 ; 1261.07,810.07 cw(c1244,827.14) 1244,803 ccw(c1244,827.14) 1261.07,810.07 ; 1278.72,813 ccw(c1278.72,861.28) 1312.86,827.14 cw(c1278.72,861.28) 1278.72,813 ; 1278.72,813 cw(c1278.72,764.72) 1312.86,798.86 ccw(c1278.72,764.72) 1278.72,813 ; 1375.28,813 ccw(c1375.28,764.72) 1341.14,798.86 cw(c1375.28,764.72) 1375.28,813 ; 1375.28,813 cw(c1375.28,861.28) 1341.14,827.14 ccw(c1375.28,861.28) 1375.28,813 ; 1391.93,806.07 ccw(c1409,823.14) 1409,799 cw(c1409,823.14) 1391.93,806.07 ; 1391.93,806.07 cw(c1374.86,789) 1399,789 ccw(c1374.86,789) 1391.93,806.07 ; R16.2@1409,789 ccw(c1435.12,815.12) 1435.12,778.18 ; R16.2@1409,789 ccw(c1435.12,815.12) 1435.12,778.18 ; R16.2@1409,789 ccw(c1435.12,815.12) 1435.12,778.18 ; R16.2@1409,789 ccw(c1435.12,815.12) 1435.12,778.18 ; R16.2@1409,789 1419.82,778.18 U3.2@1551.81,778.18 ; R16.2@1416.07,796.07 ccw(c1459.26,839.26) 1459.26,778.18 ; R16.2@1416.07,796.07 ccw(c1459.26,839.26) 1459.26,778.18 ; R16.2@1416.07,796.07 ccw(c1459.26,839.26) 1459.26,778.18 ; R16.2@1416.07,796.07 ccw(c1459.26,839.26) 1459.26,778.18 ; 1604.66,778.18 cw(c1604.66,760.66) v1@1617.05,773.05 ; 1604.66,778.18 cw(c1604.66,760.66) v1@1617.05,773.05 ; 1604.66,778.18 cw(c1604.66,760.66) v1@1617.05,773.05 ; 1604.66,778.18 cw(c1604.66,760.66) v1@1617.05,773.05 ; 1605.54,778.18 ccw(c1605.54,794.46) v1@1617.05,782.95 ; 1605.54,778.18 ccw(c1605.54,794.46) v1@1617.05,782.95 ; 1605.54,778.18 ccw(c1605.54,794.46) v1@1617.05,782.95 ; 1605.54,778.18 ccw(c1605.54,794.46) v1@1617.05,782.95 ; R15.2@1873.93,887.93 cw(c1856.86,870.86) 1881,870.86 ; R15.2@1873.93,887.93 cw(c1856.86,870.86) 1881,870.86 ; R15.2@1873.93,887.93 cw(c1856.86,870.86) 1881,870.86 ; R15.2@1873.93,887.93 cw(c1856.86,870.86) 1881,870.86 ; v1@1876.05,841.95 ccw(c1864.1,853.9) 1881,853.9 ; v1@1876.05,841.95 ccw(c1864.1,853.9) 1881,853.9 ; v1@1876.05,841.95 ccw(c1864.1,853.9) 1881,853.9 ; v1@1876.05,841.95 ccw(c1864.1,853.9) 1881,853.9 ; 1881,853.9 ccw(c1897.9,853.9) v1@1885.95,841.95 ; 1881,853.9 ccw(c1897.9,853.9) v1@1885.95,841.95 ; 1881,853.9 ccw(c1897.9,853.9) v1@1885.95,841.95 ; 1881,853.9 ccw(c1897.9,853.9) v1@1885.95,841.95 ; 1881,870.86 cw(c1905.14,870.86) R15.2@1888.07,887.93 ; 1881,870.86 cw(c1905.14,870.86) R15.2@1888.07,887.93 ; 1881,870.86 cw(c1905.14,870.86) R15.2@1888.07,887.93 ; 1881,870.86 cw(c1905.14,870.86) R15.2@1888.07,887.93
  BottomLayer w10: v1(1622,778) 1822,778 v1(1881,837) ; v1@1626.95,773.05 cw(c1638.9,761.1) 1638.9,778 ; v1@1626.95,773.05 cw(c1638.9,761.1) 1638.9,778 ; v1@1626.95,773.05 cw(c1638.9,761.1) 1638.9,778 ; v1@1626.95,773.05 cw(c1638.9,761.1) 1638.9,778 ; v1@1626.95,782.95 ccw(c1638.9,794.9) 1638.9,778 ; v1@1626.95,782.95 ccw(c1638.9,794.9) 1638.9,778 ; v1@1626.95,782.95 ccw(c1638.9,794.9) 1638.9,778 ; v1@1626.95,782.95 ccw(c1638.9,794.9) 1638.9,778 ; 1869.05,825.05 ccw(c1857.1,837) v1@1874,837 ; 1869.05,825.05 cw(c1881,813.1) v1@1881,830 ; 1869.05,825.05 ccw(c1857.1,837) v1@1874,837 ; 1869.05,825.05 cw(c1881,813.1) v1@1881,830 ; 1869.05,825.05 ccw(c1857.1,837) v1@1874,837 ; 1869.05,825.05 cw(c1881,813.1) v1@1881,830 ; 1869.05,825.05 ccw(c1857.1,837) v1@1874,837 ; 1869.05,825.05 cw(c1881,813.1) v1@1881,830
NetC9_2: C9.2 R16.1 R17.2 U3.1 | length 1306.6
  TopLayer w10: R17.2@1327,988 C9.2@1327,903 1350,903 R16.1@1409,844 1449.23,803.77 U3.1@1551.81,803.77 ; R17.2@1319.93,980.93 cw(c1302.86,963.86) 1327,963.86 ; R17.2@1319.93,980.93 cw(c1302.86,963.86) 1327,963.86 ; R17.2@1319.93,980.93 cw(c1302.86,963.86) 1327,963.86 ; R17.2@1319.93,980.93 cw(c1302.86,963.86) 1327,963.86 ; 1327,956.28 ccw(c1375.28,956.28) 1341.14,922.14 cw(c1375.28,956.28) 1327,956.28 ; 1327,956.28 cw(c1278.72,956.28) 1312.86,922.14 ccw(c1278.72,956.28) 1327,956.28 ; 1327,963.86 cw(c1351.14,963.86) R17.2@1334.07,980.93 ; 1327,963.86 cw(c1351.14,963.86) R17.2@1334.07,980.93 ; 1327,963.86 cw(c1351.14,963.86) R17.2@1334.07,980.93 ; 1327,963.86 cw(c1351.14,963.86) R17.2@1334.07,980.93 ; 1391.93,861.07 ccw(c1409,878.14) 1409,854 cw(c1409,878.14) 1391.93,861.07 ; 1391.93,861.07 cw(c1374.86,844) 1399,844 ccw(c1374.86,844) 1391.93,861.07 ; 1426.07,826.93 ccw(c1409,809.86) 1409,834 cw(c1409,809.86) 1426.07,826.93 ; 1426.07,826.93 cw(c1443.14,844) 1419,844 ccw(c1443.14,844) 1426.07,826.93 ; C9.2@1327,878 cw(c1327,762.12) 1408.94,844.06 ccw(c1327,762.12) C9.2@1327,878 ; C9.2@1327,888 cw(c1327,796.26) 1391.87,861.13 ccw(c1327,796.26) C9.2@1327,888 ; C9.2@1327,898 cw(c1327,830.4) 1374.8,878.2 ccw(c1327,830.4) C9.2@1327,898 ; C9.2@1327,908 cw(c1327,864.54) 1357.73,895.27 ccw(c1327,864.54) C9.2@1327,908
NetC13_1: C13.1 R19.1 R21.1 U3.6 | length 1378.6
  TopLayer w10: R19.1@1185,640 1220.82,675.82 U3.6@1551.81,675.82 1638.18,675.82 1694,620 R21.1@1694,580 1694,516 C13.1@1712,498 ; 1202.07,657.07 ccw(c1219.14,640) 1195,640 cw(c1219.14,640) 1202.07,657.07 ; 1202.07,657.07 cw(c1185,674.14) 1185,650 ccw(c1185,674.14) 1202.07,657.07 ; R21.1@1686.93,572.93 cw(c1669.86,555.86) 1694,555.86 ; R21.1@1686.93,572.93 cw(c1669.86,555.86) 1694,555.86 ; R21.1@1686.93,572.93 cw(c1669.86,555.86) 1694,555.86 ; R21.1@1686.93,572.93 cw(c1669.86,555.86) 1694,555.86 ; R21.1@1686.93,587.07 ccw(c1669.86,604.14) 1694,604.14 ; R21.1@1686.93,587.07 ccw(c1669.86,604.14) 1694,604.14 ; R21.1@1686.93,587.07 ccw(c1669.86,604.14) 1694,604.14 ; R21.1@1686.93,587.07 ccw(c1669.86,604.14) 1694,604.14 ; 1694,555.86 cw(c1718.14,555.86) R21.1@1701.07,572.93 ; 1694,555.86 cw(c1718.14,555.86) R21.1@1701.07,572.93 ; 1694,555.86 cw(c1718.14,555.86) R21.1@1701.07,572.93 ; 1694,555.86 cw(c1718.14,555.86) R21.1@1701.07,572.93 ; 1694,604.14 ccw(c1718.14,604.14) R21.1@1701.07,587.07 ; 1694,604.14 ccw(c1718.14,604.14) R21.1@1701.07,587.07 ; 1694,604.14 ccw(c1718.14,604.14) R21.1@1701.07,587.07 ; 1694,604.14 ccw(c1718.14,604.14) R21.1@1701.07,587.07 ; 1694,529.38 ccw(c1738.38,529.38) 1707,498 cw(c1738.38,529.38) 1694,529.38 ; 1694,553.53 ccw(c1762.53,553.53) 1714.07,505.07 cw(c1762.53,553.53) 1694,553.53 ; R21.1@1694,577.67 ccw(c1786.67,577.67) 1721.14,512.14 cw(c1786.67,577.67) R21.1@1694,577.67
NetC13_2: C13.2 R21.2 R22.2 U3.7 | length 1274.2
  TopLayer w10: U3.7@1551.81,650.23 1600.77,650.23 1639,612 R21.2@1639,580 1639,515 C13.2@1622,498 1685,435 ; R22.2@1685,414 1685,435 ; R21.2@1631.93,572.93 cw(c1614.86,555.86) 1639,555.86 ; R21.2@1631.93,572.93 cw(c1614.86,555.86) 1639,555.86 ; R21.2@1631.93,572.93 cw(c1614.86,555.86) 1639,555.86 ; R21.2@1631.93,572.93 cw(c1614.86,555.86) 1639,555.86 ; R21.2@1631.93,587.07 ccw(c1614.86,604.14) 1639,604.14 ; R21.2@1631.93,587.07 ccw(c1614.86,604.14) 1639,604.14 ; R21.2@1631.93,587.07 ccw(c1614.86,604.14) 1639,604.14 ; R21.2@1631.93,587.07 ccw(c1614.86,604.14) 1639,604.14 ; 1639,555.86 cw(c1663.14,555.86) R21.2@1646.07,572.93 ; 1639,555.86 cw(c1663.14,555.86) R21.2@1646.07,572.93 ; 1639,555.86 cw(c1663.14,555.86) R21.2@1646.07,572.93 ; 1639,555.86 cw(c1663.14,555.86) R21.2@1646.07,572.93 ; 1639,604.14 ccw(c1663.14,604.14) R21.2@1646.07,587.07 ; 1639,604.14 ccw(c1663.14,604.14) R21.2@1646.07,587.07 ; 1639,604.14 ccw(c1663.14,604.14) R21.2@1646.07,587.07 ; 1639,604.14 ccw(c1663.14,604.14) R21.2@1646.07,587.07 ; R22.2@1678.7,421.76 ccw(c1667.95,435) 1685,435 ; R22.2@1678.7,421.76 ccw(c1667.95,435) 1685,435 ; R22.2@1678.7,421.76 ccw(c1667.95,435) 1685,435 ; R22.2@1678.7,421.76 ccw(c1667.95,435) 1685,435 ; 1685,435 ccw(c1702.05,435) R22.2@1691.3,421.76 ; 1685,435 ccw(c1702.05,435) R22.2@1691.3,421.76 ; 1685,435 ccw(c1702.05,435) R22.2@1691.3,421.76 ; 1685,435 ccw(c1702.05,435) R22.2@1691.3,421.76 ; C13.2@1612.86,512.14 ccw(c1549.75,575.25) 1639,575.25 cw(c1549.75,575.25) C13.2@1612.86,512.14 ; C13.2@1619.93,505.07 ccw(c1573.89,551.11) 1639,551.11 cw(c1573.89,551.11) C13.2@1619.93,505.07 ; C13.2@1627,478 cw(c1627,441.79) 1652.61,467.39 ccw(c1627,441.79) C13.2@1627,478 ; C13.2@1627,498 ccw(c1598.03,526.97) 1639,526.97 cw(c1598.03,526.97) C13.2@1627,498 ; C13.2@1637,498 ccw(c1673.21,498) 1647.61,472.39 cw(c1673.21,498) C13.2@1637,498 ; C13.2@1647,498 ccw(c1707.36,498) 1664.68,455.32 cw(c1707.36,498) C13.2@1647,498